# Altium PCB ORCS4.PcbDoc (part 1 of 2)
Units mm, origin at the board's own origin, x right, y up, seen from the top; angles counter-clockwise.
Board outline 75.18 x 74.8 mm, 2 copper layers (Top Layer, Bottom Layer); 94 components, 96 nets, 440 pads, 113 vias.
Unrouted connection lines stored in the file: 4.
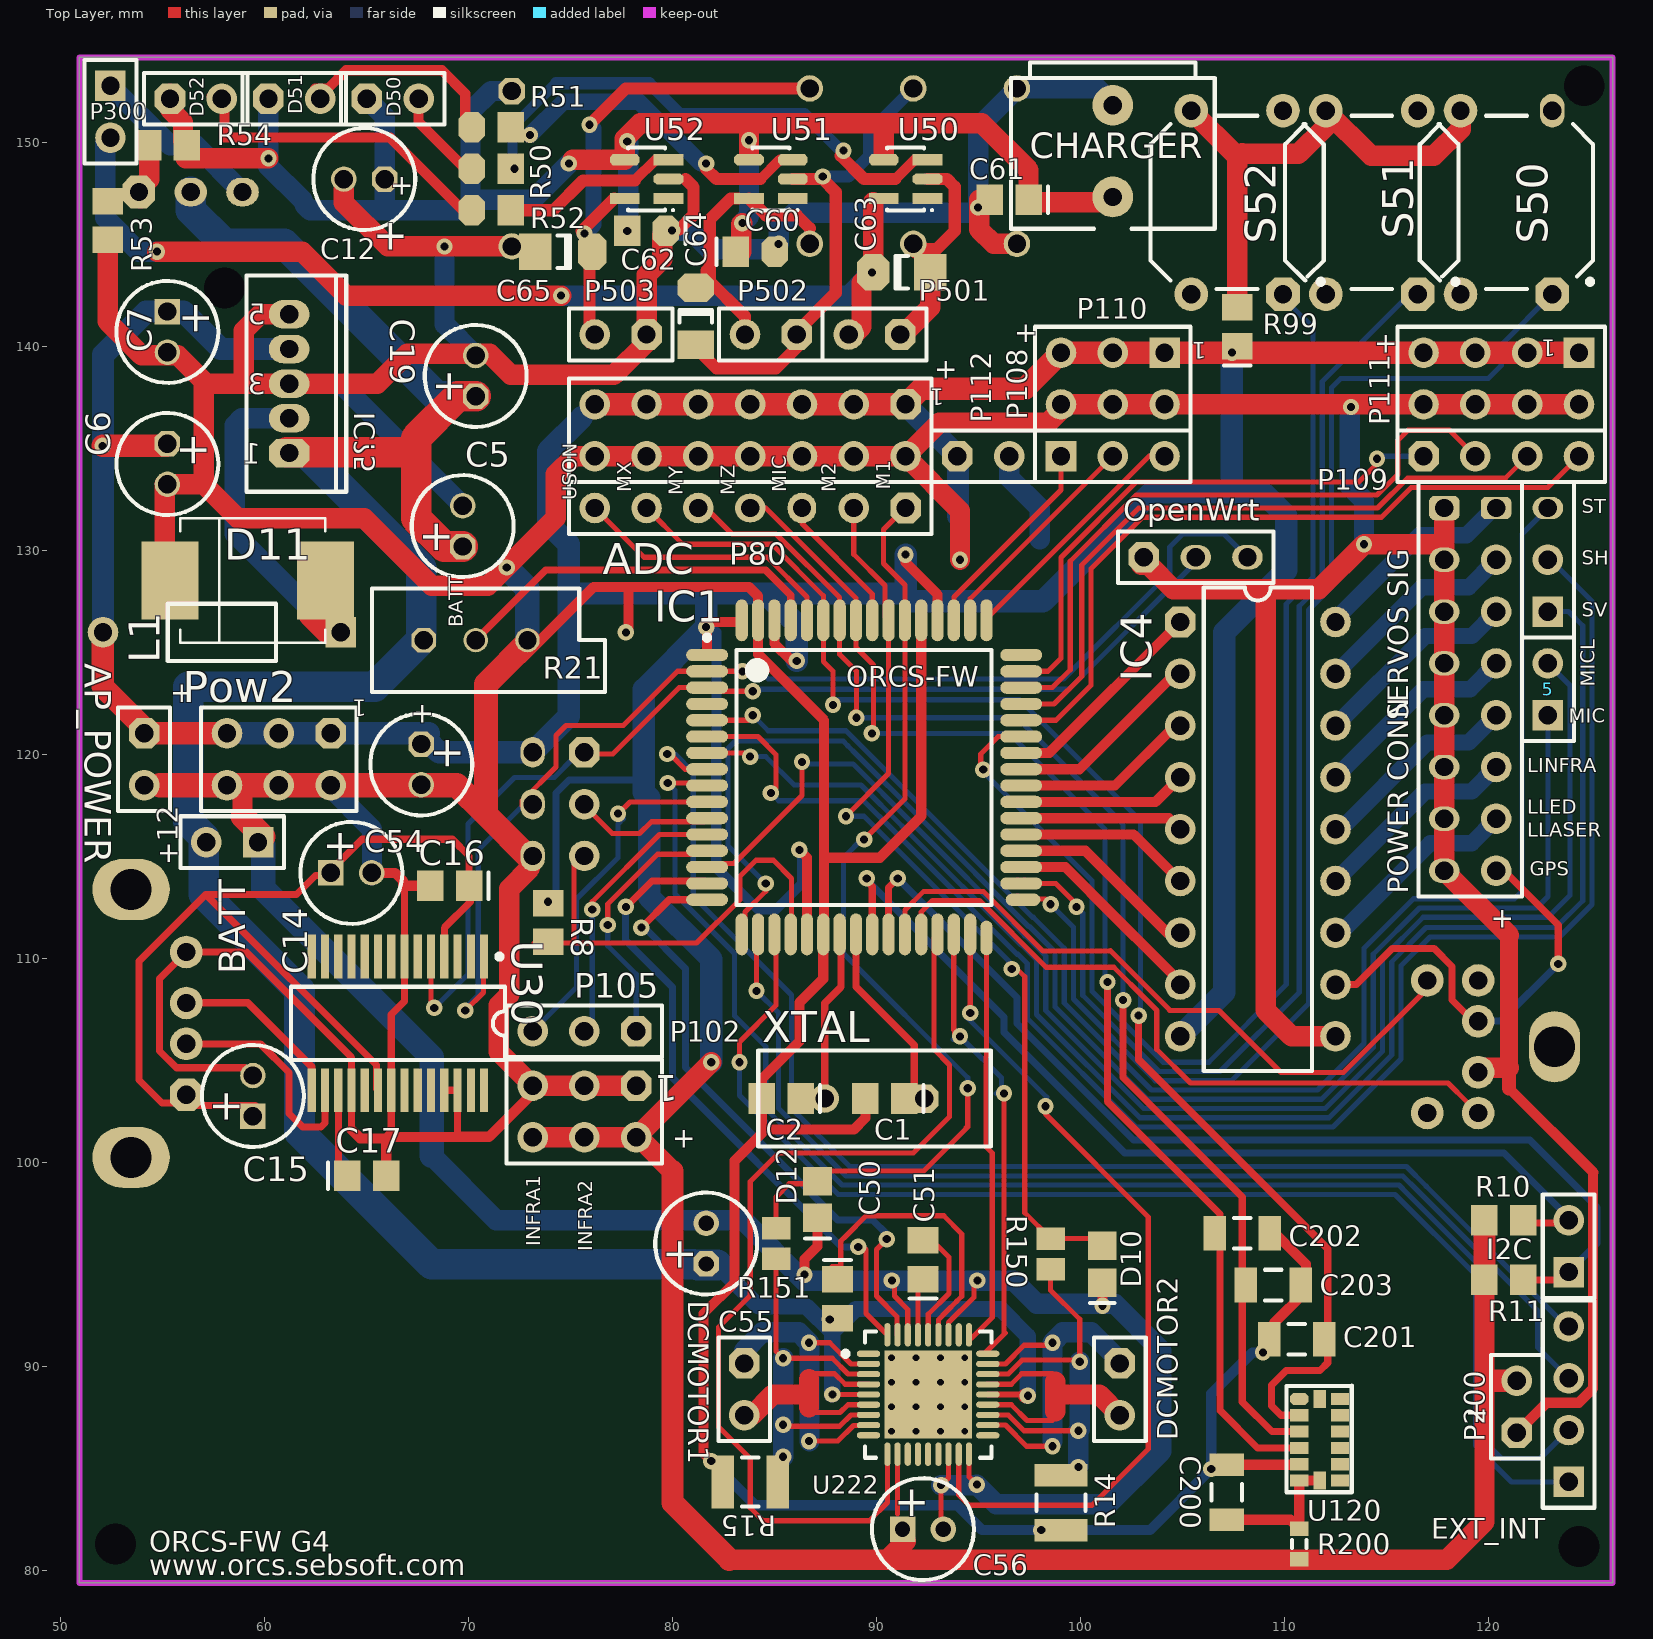
[diagram p0: Top Layer view]
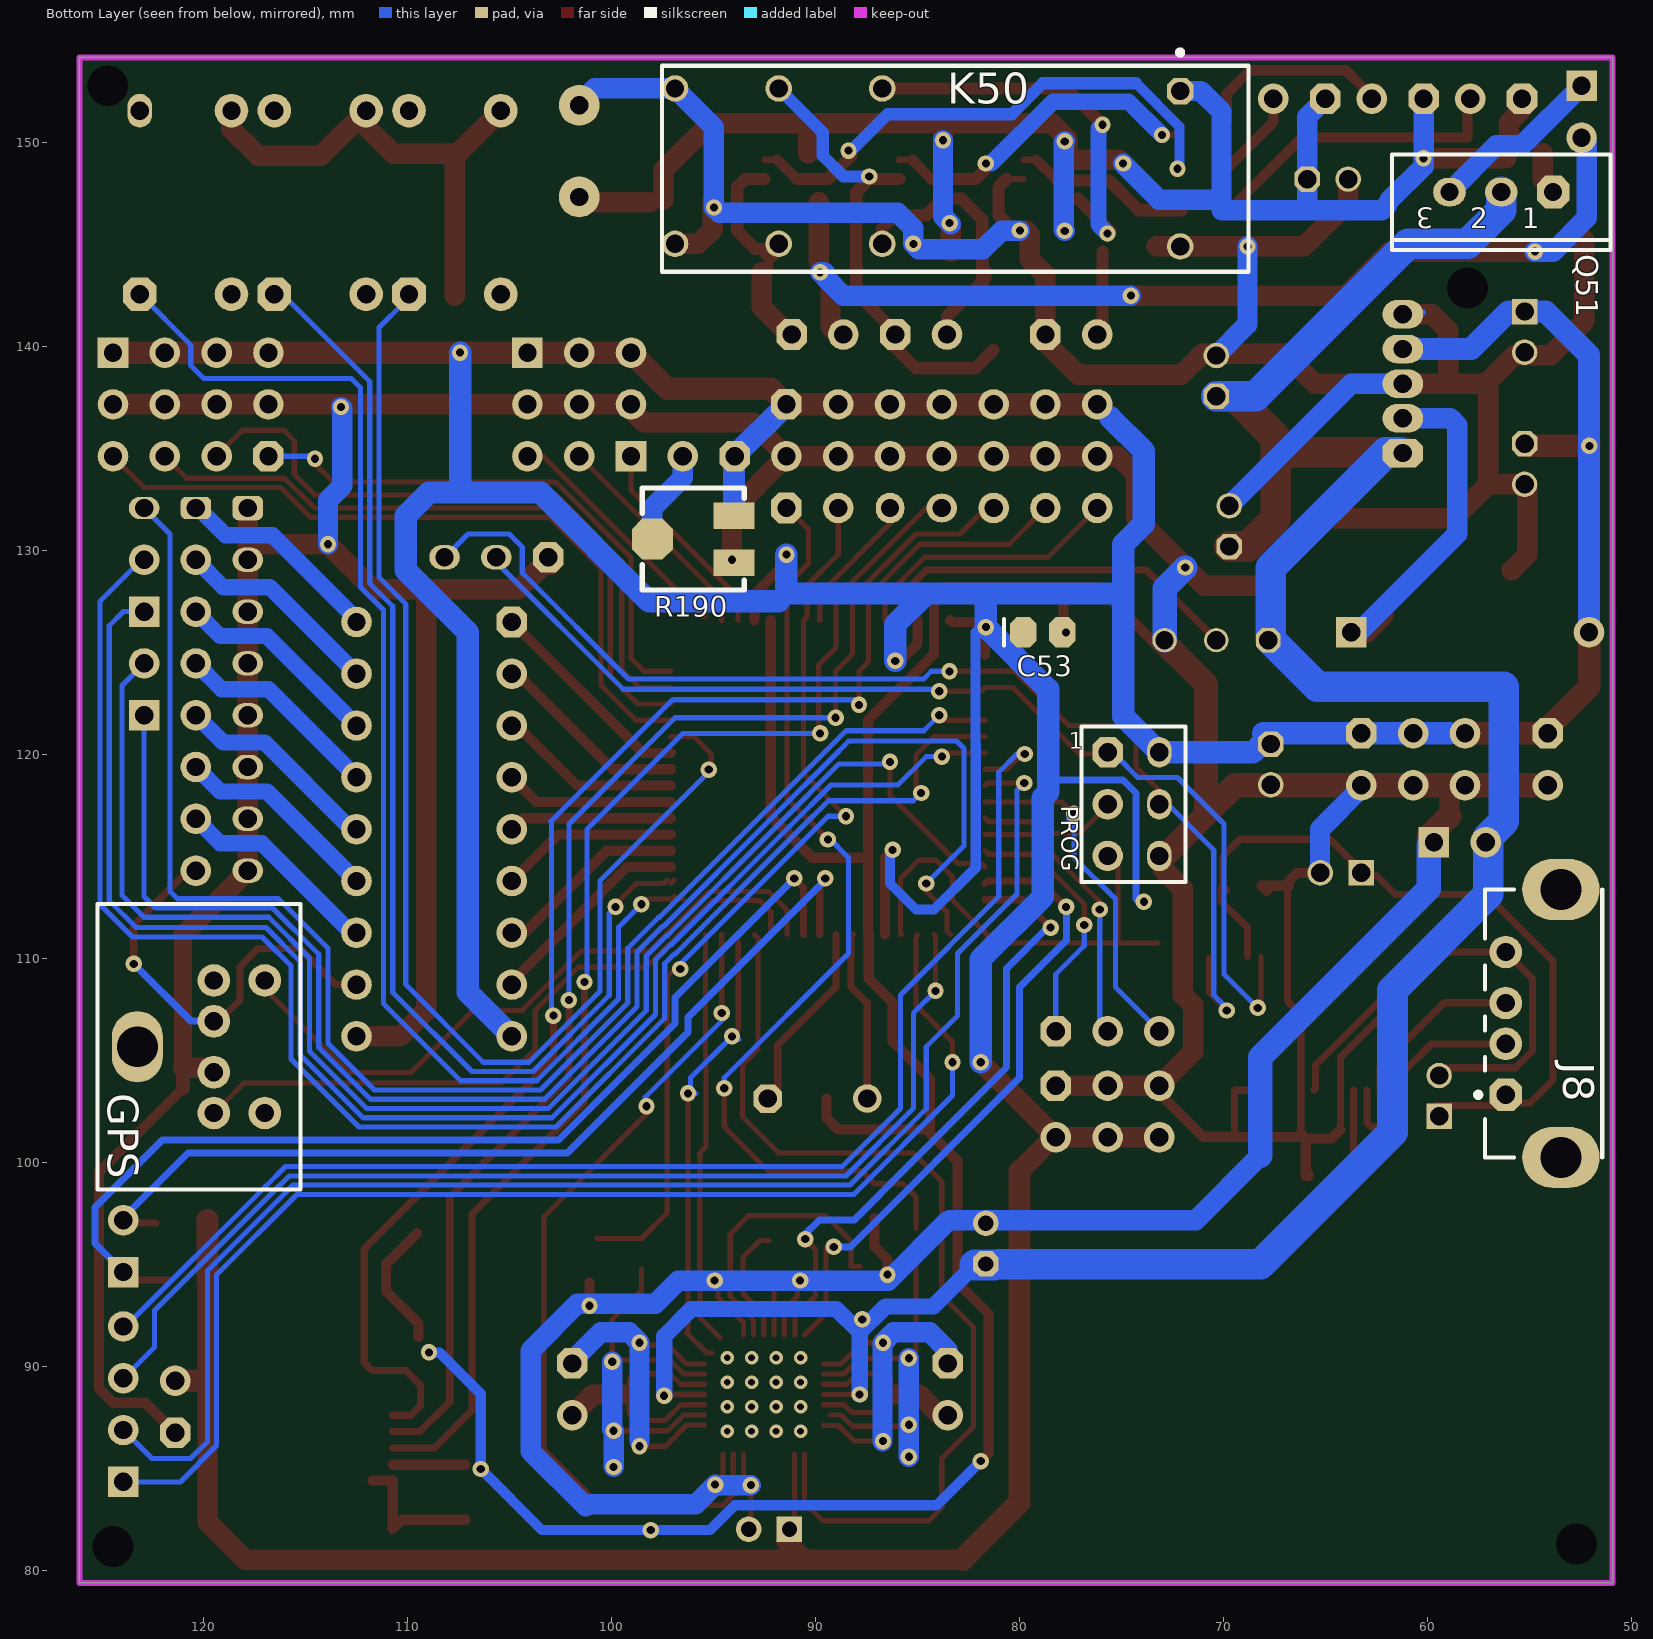
[diagram p1: Bottom Layer view, seen from below]

## Layer stack, top to bottom
Top Layer: signal copper 0.0356
Dielectric: dielectric 0.32, FR-4, Dk 4.8
Bottom Layer: signal copper 0.0356

## Board outline
50.927,79.375 126.111,79.375 126.111,154.178 50.927,154.178

## Design rules (kind name [scope] priority, off if disabled: settings)
Clearance [All] p1: gap=0.2
FabricationTestPointUsage TestPointUsage [All] p1: valid=0 allowmultiple=FALSE
FabricationTestpoint Testpoint [All] p1: side=3 testpointundercomponent=TRUE minsize=1.016 maxsize=2.54 preferedsize=1.524 minholesize=0 maxholesize=1.016 preferedholesize=0.813 testpointgrid=0.025 allowsidetop=TRUE allowsidebottom=TRUE usegrid=TRUE gridtolerance=0
PolygonConnect [All] p1: connectstyle=Relief reliefconductorwidth=0.254 reliefentries=4 polygonreliefangle="90 Angle"
RoomDefinition ORCS4 [InComponentClass('ORCS4')] p1: confinementstyle=ConfineIn formatcopy=TRUE lockcomponents=FALSE outline 126.873,77.724 144.907,77.724 144.907,98.298 126.873,98.298
RoutingVias [All] p1: holewidth=0.4 width=0.8 viastyle="Through Hole" minholewidth=0.4 minwidth=0.8 maxholewidth=0.4 maxwidth=0.8
SilkscreenOverComponentPads [All] p1: minsilkscreentomaskgap=0.254
SolderMaskExpansion [All] p1: expansion=0.102
Width Width_12V [InNet('+12V')] p1: maxlimit=1.5 minlimit=0.7 preferedwidth=1
Width Width_GROUND [InNet('GROUND')] p2: maxlimit=1.2 minlimit=0.254 preferedwidth=0.5
Width Width_5V [InNet('5V')] p3: maxlimit=1.2 minlimit=0.254 preferedwidth=0.35
Width [All] p4: maxlimit=1.1 minlimit=0.254 preferedwidth=0.254
25 further rules are at their usual default settings.

## Components (designator, comment, footprint, x,y, rotation, side; value= is the part's Value field where it differs from the comment)
5 "Header 2" HDR1X2#1 122.936,121.92 r90 top (schematic designator SERVO2)
ADC "Header 7" HDR1X7 91.44,132.08 r180 top
AP_POWER "Header 2" HDR1X2#2 54.102,121.031 r270 top
BATT "Header 2" HDR1X2#1 59.69,115.697 r180 top
C1 "Cap Pol3" C0805#1 90.424,103.124 r180 top
C2 "Cap Pol3" C0805#1 85.344,103.124 r180 top
C5 "Cap Pol1" B#1 69.723,131.191 r90 top
C6 "Cap Pol1" B#1 55.245,134.239 r270 top
C7 "Cap Pol1" B#2 55.245,140.716 r270 top
C12 "Cap Pol1" B#1 64.897,148.209 r180 top
C14 "Cap Pol1" B#2 64.262,114.189 r0 top
C15 "Cap Pol1" B#2 59.436,103.251 r90 top
C16 "Cap Pol3" C0805#1 69.088,113.554 r180 top
C17 "Cap Pol3" C0805#1 65.024,99.33 r0 top
C19 "Cap Pol1" B#1 70.358,138.557 r90 top
C50 "Cap Pol3" C0805#1 88.103,93.31 r270 top
C51 "Cap Pol3" C0805#1 92.294,95.215 r90 top
C53 "Cap Pol3" C0805#2 78.867,125.984 r180 bottom
C54 "Cap Pol1" B#1 67.691,119.507 r270 top
C55 "Cap Pol1" B#3 81.661,96.012 r90 top
C56 "Cap Pol1" B#4 92.294,82.007 r0 top
C60 "Cap Pol3" C0805#3 84.074,144.653 r0 top
C61 "Cap Pol3" C0805#1 96.52,147.193 r180 top
C62 "Cap Pol3" C0805#4 78.74,145.669 r180 top
C63 "Cap Pol3" C1206#1 91.247,143.637 r0 top
C64 "Cap Pol3" C1206#2 81.153,141.478 r270 top
C65 "Cap Pol3" C1206#3 74.676,144.653 r180 top
C200 "Cap Semi" CAPC3216L 107.188,83.82 r270 top
C201 "Cap Semi" CAPC3216L 110.617,91.313 r180 top
C202 "Cap Semi" CAPC3216L 107.95,96.52 r180 top
C203 "Cap Semi" CAPC3216L 109.474,93.98 r180 top
CHARGER "161-0097" 161 101.6,155.829 r90 top (schematic designator CHAR)
D10 "D Zener" CAPC2512L 101.092,94.996 r90 top
D11 "Diode 1N5408" DIODE_SMC 59.182,128.524 r0 top
D12 "D Zener" CAPC2512L 87.122,98.171 r90 top
D50 "Diode" HDR1X2#2 65.024,152.146 r0 top
D51 "Diode" HDR1X2#2 60.198,152.146 r0 top
D52 "Diode" HDR1X2#2 55.372,152.146 r0 top
DCMOTOR1 "Header 2" HDR1X2#2 83.531,90.135 r270 top
DCMOTOR2 "Header 2" HDR1X2#2 101.946,90.135 r270 top
EXT_INT "Header 4" HDR1X4#1 123.952,84.328 r90 top (schematic designator SENSORS)
GPS "PS2-6PIN" PS2-6PIN 128.016,105.664 r90 bottom
I2C "Header 2" HDR1X2#1 123.952,94.615 r90 top
IC1 "ATmega128L-8AI" 64A_M 89.408,118.872 r0 top
IC4 "SW DIP-9" DIP-18 108.712,116.332 r270 top
IC?5 "LM2576T-5" 314D-03 61.214,138.176 r90 top (schematic designator IC�5)
J8 "787616-1" 787616 43.18,106.807 r180 bottom
K50 "Relay-DPDT" DIP-P8 74.676,148.717 r0 bottom
L1 "Inductor" PIN-W2/E2.8 57.912,125.984 r180 top
OpenWrt "Header 3" HDR1X3#1 103.124,129.667 r0 top
P80 "Header 7X2A" HDR2X7_CEN 91.44,137.16 r180 top
P102 "Header 3X2" HDR2X3#1 78.232,103.759 r180 top
P105 "Header 3" HDR1X3#2 78.232,106.426 r180 top
P108 "Header 3" HDR1X3#3 99.06,134.62 r0 top
P109 "Header 4" HDR1X4#2 116.84,134.62 r0 top
P110 "Header 3X2" HDR2X3#2 104.14,139.7 r180 top
P111 "Header 4X2" HDR2X4 124.46,139.7 r180 top
P112 "Header 2" HDR1X2#2 93.98,134.62 r0 top
P200 "Header 2" HDR1X2#2 121.412,86.741 r90 top
P300 "ON/OFF" HDR1X2#1 52.451,152.781 r270 top
P501 "Header 2" HDR1X2#2 91.186,140.589 r180 top
P502 "Header 2" HDR1X2#2 86.106,140.589 r180 top
P503 "Header 2" HDR1X2#2 78.74,140.589 r180 top
Pow2 "Header 3X2" HDR2X3#1 63.246,121.031 r180 top
"POWER CONN" "Header 8X2" HDR2X8 117.856,132.08 r270 top (schematic designator CON1)
PROG "Header 3X2" HDR2X3#3 75.692,120.099 r270 bottom (schematic designator PROGRAMMER)
Q51 "IRF4905" TO-220AB 56.388,147.574 r0 bottom
R8 "Res2" 2012[0805]#1 73.914,111.76 r270 top
R10 "Res2" 2012[0805]#1 120.777,97.155 r0 top
R11 "Res2" 2012[0805]#1 120.777,94.234 r0 top
R14 "Res2" RESC3225L 99.06,83.312 r90 top
R15 "Res2" RESC3225L 83.82,84.328 r0 top
R21 "Res Tap" VR5 70.358,125.603 r0 top
R50 "Res2" 2012[0805]#2 71.12,148.717 r180 top
R51 "Res2" 2012[0805]#2 71.12,150.749 r180 top
R52 "Res2" 2012[0805]#2 71.12,146.685 r180 top
R53 "Res2" 2012[0805]#1 52.324,146.177 r270 top
R54 "Res2" 2012[0805]#1 55.245,149.86 r180 top
R99 "Res2" C0805#1 107.696,140.97 r90 top
R150 "Res2" CAPC2012L 98.552,95.504 r270 top
R151 "Res2" CAPC2012L 85.09,96.012 r270 top
R190 "RPot SM 10K" POT4MM-2 96.012,130.556 r0 bottom
R200 "Res3" RESC1608L 110.744,81.28 r270 top
S50 "IT-2175" IT-2175#1 120.904,147.066 r90 top
S51 "IT-2175" IT-2175#2 114.3,147.066 r90 top
S52 "IT-2175" IT-2175#2 107.696,147.066 r90 top
"SERVOS SIG" "Header 3" HDR1X3#4 122.936,127 r90 top (schematic designator SERVOS)
U30 "FT232RL" SSOP28 66.548,106.807 r180 top
U50 "MAX6305UK00D1-T" SOT23-5#1 91.44,148.209 r90 top
U51 "MAX6305UK00D1-T" SOT23-5#2 84.836,148.209 r90 top
U52 "MAX6305UK00D1-T" SOT23-5#1 78.74,148.209 r90 top
U120 "MEMS" "LGA14 - duplicate" 110.744,88.392 r0 top
U222 "A3995" QFN50P600X600-36V1M 92.548,88.611 r0 top
XTAL "ECS-44-20-1" HC-49U 89.916,103.124 r180 top

## Footprints (in the part's own frame and the unit in brackets; to place one, negate y for a bottom-side part, rotate by r counter-clockwise, add the part's x,y. Pads: shape width x height; smd on the part's side, far side on the other; paste and mask are expansions set on the pad)
64A_M [mm] "Thin QFP, 64-Leads, Body 14x14mm, Pitch 0.8mm, IPC Low Density"
  oval 2.05x0.6 smd: 1(-7.7,6) 2(-7.7,5.2) 3(-7.7,4.4) 4(-7.7,3.6) 5(-7.7,2.8) 6(-7.7,2) 7(-7.7,1.2) 8(-7.7,0.4) 9(-7.7,-0.4) 10(-7.7,-1.2) 11(-7.7,-2) 12(-7.7,-2.8) 13(-7.7,-3.6) 14(-7.7,-4.4) 15(-7.7,-5.2) 16(-7.7,-6) 34(7.7,-5.2) 35(7.7,-4.4) 36(7.7,-3.6) 37(7.7,-2.8) 38(7.7,-2) 39(7.7,-1.2) 40(7.7,-0.4) 41(7.7,0.4) 42(7.7,1.2) 43(7.7,2) 44(7.7,2.8) 45(7.7,3.6) 46(7.7,4.4) 47(7.7,5.2) 48(7.7,6)
  oval 0.6x2.05 smd: 17(-6,-7.7) 18(-5.2,-7.7) 19(-4.4,-7.7) 20(-3.6,-7.7) 21(-2.8,-7.7) 22(-2,-7.7) 23(-1.2,-7.7) 24(-0.4,-7.7) 25(0.4,-7.7) 26(1.2,-7.7) 27(2,-7.7) 28(2.8,-7.7) 29(3.6,-7.7) 30(4.4,-7.7) 31(5.2,-7.7) 49(6,7.7) 50(5.2,7.7) 51(4.4,7.7) 52(3.6,7.7) 53(2.8,7.7) 54(2,7.7) 55(1.2,7.7) 56(0.4,7.7) 57(-0.4,7.7) 58(-1.2,7.7) 59(-2,7.7) 60(-2.8,7.7) 61(-3.6,7.7) 62(-4.4,7.7) 63(-5.2,7.7) 64(-6,7.7)
  oval 0.6x1.7 smd: 32(6,-7.872)
  oval 1.7x0.6 smd: 33(7.792,-6)
  silkscreen extent -7.82,-6.25 6.25,6.97, body extent -7,-7 7,7, height 1.2
161 [mm] "Two Conductor Jack (RCA), Right Angle, Thru-Hole, Body 10 x 10 x 13 mm (WxTxH)"
  round 2 hole 0.9: 1A(-4,0) 2B(-8.496,0)
  silkscreen extent -10.07,-5 -1.9,5
314D-03 [mm] "TO, Thru-Hole, Vertical, Heatsink Mounted; 5 In-Line Leads; Pitch 1.70 mm"
  oct 1.4x2 hole 0.9: 1(-3.4,0)
  oval 1.4x2 hole 0.9: 2(-1.7,0) 3(0,0) 4(1.7,0) 5(3.4,0)
  silkscreen extent -5.3,-2.8 5.3,2.1
2012[0805]#1 [mm] "Chip Resistor; Body 2.0 x 1.3 mm (LxW typ)"
  rect 1.3x1.5 smd: 1(-0.95,0) 2(0.95,0)
2012[0805]#2 [mm]
  rect 1.3x1.5 smd: 1(-0.95,0)
  oct 1.3x1.5 smd: 2(0.95,0)
787616 [mm] "Connector; USB1.1, Type A, Thru-Hole; 4 Position; Right Angle"
  oct 1.6x1.6 hole 0.9: 1(-12.99,-3.5)
  round 1.6 hole 0.9: 2(-12.99,-1) 3(-12.99,1) 4(-12.99,3.5)
  oval 3.8x3 hole 2: 5(-10.28,6.57) 6(-10.28,-6.57)
  silkscreen extent -14.47,-6.57 -8.25,6.57
B#1 [mm] "Capacitor, Electrolytic, Radial; Body 5 x 6.8 mm (Dia.xH typ); Pin Spacing 2 mm (typ)"
  oct 1.25x1.25 hole 0.9: 1(-1,0)
  round 1.25 hole 0.9: 2(1,0)
  silkscreen extent -2.5,-2.5 2.5,2.5
B#2 [mm] "Capacitor, Electrolytic, Radial; Body 5 x 6.8 mm (Dia.xH typ); Pin Spacing 2 mm (typ)"
  rect 1.25x1.25 hole 0.9: 1(-1,0)
  round 1.25 hole 0.9: 2(1,0)
  silkscreen extent -2.5,-2.5 2.5,2.5
B#3 [mm]
  oct 1.25x1.25 hole 0.75: 1(-1,0)
  round 1.25 hole 0.75: 2(1,0)
  silkscreen extent -2.5,-2.5 2.5,2.5
B#4 [mm]
  rect 1.25x1.25 hole 0.75: 1(-1,0)
  round 1.25 hole 0.75: 2(1,0)
  silkscreen extent -2.5,-2.5 2.5,2.5
C0805#1 [mm] "Chip Capacitor; Body 2.0 x 1.2 mm (LxW typ)"
  rect 1.3x1.5 smd: 1(-0.95,0) 2(0.95,0)
  silkscreen extent -1.9,-0.65 -1.9,0.65
C0805#2 [mm] "Chip Capacitor; Body 2.0 x 1.2 mm (LxW typ)"
  oct 1.3x1.5 smd: 1(-0.95,0) 2(0.95,0)
  silkscreen extent -1.9,-0.65 -1.9,0.65
C0805#3 [mm] "Chip Capacitor; Body 2.0 x 1.2 mm (LxW typ)"
  rect 1.3x1.5 smd: 1(-0.95,0)
  oct 1.3x1.5 smd: 2(0.95,0)
  silkscreen extent -1.9,-0.65 -1.9,0.65
C0805#4 [mm]
  oct 1.3x1.5 smd: 1(-0.95,0)
  rect 1.3x1.5 smd: 2(0.95,0)
  silkscreen extent -1.9,-0.65 -1.9,0.65
C1206#1 [mm] "Chip Capacitor; Body 3.2 x 1.6 mm (LxW typ)"
  oct 1.6x1.8 smd: 1(-1.4,0)
  rect 1.6x1.8 smd: 2(1.4,0)
  silkscreen extent -0.3,-0.8 0.3,0.8
C1206#2 [mm] "Chip Capacitor; Body 3.2 x 1.6 mm (LxW typ)"
  oct 1.4x1.8 smd: 1(-1.4,0)
  rect 1.4x1.8 smd: 2(1.4,0)
  silkscreen extent -0.3,-0.8 0.3,0.8
C1206#3 [mm] "Chip Capacitor; Body 3.2 x 1.6 mm (LxW typ)"
  oct 1.4x1.8 smd: 1(-1.4,0)
  rect 1.6x1.8 smd: 2(1.4,0)
  silkscreen extent -0.3,-0.8 0.3,0.8
CAPC2012L [mm] "Chip Capacitor, Body 2.0x1.3mm, IPC High Density"
  rect 1.1x1.4 smd: 1(-0.75,0) 2(0.75,0)
  body extent -1.1,-0.72 1.1,0.72, height 1.4
CAPC2512L [mm] "Chip Capacitor, Body 2.54x1.27mm, IPC High Density"
  rect 1.4x1.4 smd: 1(-0.9,0) 2(0.9,0)
  silkscreen extent -1.9,-0.6 -1.9,0.6, body extent -1.45,-0.82 1.45,0.82, height 1.3
CAPC3216L [mm] "Chip Capacitor, Body 3.2x1.6mm, IPC High Density"
  rect 1.1x1.7 smd: 1(-1.35,0) 2(1.35,0)
  silkscreen extent -0.4,-0.75 0.4,0.75, body extent -1.7,-0.9 1.7,0.9, height 1.3
DIODE_SMC [mil] "Magnetic-Core Inductor with Winding Polarity Marking; 2 Leads"
  rect 110x150 smd: 1(-150,0) 2(150,0)
  silkscreen extent -130,-120 150,120
DIP-18 [mm] "DIP; 18 Leads; Row Spacing 7.62 mm; Pitch 2.54 mm"
  oct 1.5x1.5 hole 0.9: 1(-10.16,-3.81)
  round 1.5 hole 0.9: 2(-7.62,-3.81) 3(-5.08,-3.81) 4(-2.54,-3.81) 5(0,-3.81) 6(2.54,-3.81) 7(5.08,-3.81) 8(7.62,-3.81) 9(10.16,-3.81) 10(10.16,3.81) 11(7.62,3.81) 12(5.08,3.81) 13(2.54,3.81) 14(0,3.81) 15(-2.54,3.81) 16(-5.08,3.81) 17(-7.62,3.81) 18(-10.16,3.81)
  silkscreen extent -11.85,-2.65 11.85,2.65
DIP-P8 [mm] "Dual-Pole Dual-Throw Relay; 8 Leads"
  oct 1.3x1.3 hole 0.9: 1(-2.54,-3.81)
  round 1.3 hole 0.9: 2(-2.54,3.81) 11(17.145,3.683) 12(12.065,3.683) 14(22.225,3.683) 21(17.145,-3.937) 22(12.065,-3.937) 24(22.225,-3.937)
  silkscreen extent -5.9,-5.82 22.86,5.05
HC-49U [mm] "Quartz Crystal, Thru-Hole; 2 Leads; Body 11.35 x 4.65 x 13.46 mm (LxWxH max)"
  oct 1.4x1.4 hole 0.9: 1(-2.44,0)
  round 1.4 hole 0.9: 2(2.44,0)
  silkscreen extent -5.7,-2.35 5.7,2.35
HDR1X2#1 [mm] "Connector; Header; 2 Position"
  rect 1.5x1.5 hole 0.9: 1(0,0)
  round 1.5 hole 0.9: 2(2.54,0)
  silkscreen extent -1.27,-1.27 3.81,1.27
HDR1X2#2 [mm] "Connector; Header; 2 Position"
  oct 1.5x1.5 hole 0.9: 1(0,0)
  round 1.5 hole 0.9: 2(2.54,0)
  silkscreen extent -1.27,-1.27 3.81,1.27
HDR1X3#1 [mm] "Connector; Header; 3 Position"
  oct 1.5x1.5 hole 0.9: 1(0,0)
  oval 1.5x1.2 hole 0.9: 2(2.54,0) 3(5.08,0)
  silkscreen extent -1.27,-1.27 6.35,1.27
HDR1X3#2 [mm] "Connector; Header; 3 Position"
  oct 1.5x1.5 hole 0.9: 1(0,0)
  round 1.5 hole 0.9: 2(2.54,0) 3(5.08,0)
  silkscreen extent -1.27,-1.27 6.35,1.27
HDR1X3#3 [mm] "Connector; Header; 3 Position"
  rect 1.5x1.5 hole 0.9: 1(0,0)
  round 1.5 hole 0.9: 2(2.54,0) 3(5.08,0)
  silkscreen extent -1.27,-1.27 6.35,1.27
HDR1X3#4 [mm] "Connector; Header; 3 Position"
  rect 1.5x1.5 hole 0.9: 1(0,0)
  round 1.5 hole 0.9: 2(2.54,0)
  oval 1.1x1.5 hole 0.9: 3(5.08,0)
  silkscreen extent -1.27,-1.27 6.35,1.27
HDR1X4#1 [mm] "Connector; Header; 4 Position"
  rect 1.5x1.5 hole 0.9: 1(0,0)
  round 1.5 hole 0.9: 2(2.54,0) 3(5.08,0) 4(7.62,0)
  silkscreen extent -1.27,-1.27 8.89,1.27
HDR1X4#2 [mm] "Connector; Header; 4 Position"
  oct 1.5x1.5 hole 0.9: 1(0,0)
  round 1.5 hole 0.9: 2(2.54,0) 3(5.08,0) 4(7.62,0)
  silkscreen extent -1.27,-1.27 8.89,1.27
HDR1X7 [mm] "Connector; Header; 7 Position"
  oct 1.5x1.5 hole 0.9: 1(0,0)
  round 1.5 hole 0.9: 2(2.54,0) 5(10.16,0) 6(12.7,0) 7(15.24,0)
  oval 1.4x1.5 hole 0.9: 3(5.08,0)
  oval 1.5x1.4 hole 0.9: 4(7.62,0)
  silkscreen extent -1.27,-1.27 16.51,1.27
HDR2X3#1 [mm] "Connector; Header; 3x2 Position"
  oct 1.5x1.5 hole 0.9: 1(0,0)
  round 1.5 hole 0.9: 2(0,2.54) 3(2.54,0) 4(2.54,2.54) 5(5.08,0) 6(5.08,2.54)
  silkscreen extent -1.27,-1.27 6.35,3.81
HDR2X3#2 [mm] "Connector; Header; 3x2 Position"
  rect 1.5x1.5 hole 0.9: 1(0,0)
  round 1.5 hole 0.9: 2(0,2.54) 3(2.54,0) 4(2.54,2.54) 5(5.08,0) 6(5.08,2.54)
  silkscreen extent -1.27,-1.27 6.35,3.81
HDR2X3#3 [mm] "Connector; Header; 3x2 Position"
  oct 1.5x1.5 hole 0.9: 1(0,0)
  oval 1.5x1.2 hole 0.9: 2(0,2.54) 4(2.54,2.54) 6(5.08,2.54)
  round 1.5 hole 0.9: 3(2.54,0) 5(5.08,0)
  silkscreen extent -1.27,-1.27 6.35,3.81
HDR2X4 [mm] "Connector; Header; 4x2 Position"
  rect 1.5x1.5 hole 0.9: 1(0,0)
  round 1.5 hole 0.9: 2(0,2.54) 3(2.54,0) 4(2.54,2.54) 5(5.08,0) 6(5.08,2.54) 7(7.62,0) 8(7.62,2.54)
  silkscreen extent -1.27,-1.27 8.89,3.81
HDR2X7_CEN [mm] "Connector; Header; 7x2 Position"
  oct 1.5x1.5 hole 0.9: 1(0,0)
  round 1.5 hole 0.9: 2(2.54,0) 3(5.08,0) 4(7.62,0) 5(10.16,0) 6(12.7,0) 7(15.24,0) 8(0,2.54) 9(2.54,2.54) 10(5.08,2.54) 11(7.62,2.54) 12(10.16,2.54) 13(12.7,2.54) 14(15.24,2.54)
  silkscreen extent -1.27,-1.27 16.51,3.81
HDR2X8 [mm] "Connector; Header; 8x2 Position"
  rrect50% 1.2x1.5 hole 0.9: 1(0,0)
  rrect50% 1.1x1.5 hole 0.9: 2(0,2.54)
  oval 1.2x1.5 hole 0.9: 3(2.54,0) 5(5.08,0) 7(7.62,0) 9(10.16,0) 11(12.7,0) 13(15.24,0) 15(17.78,0)
  round 1.5 hole 0.9: 4(2.54,2.54) 6(5.08,2.54) 8(7.62,2.54) 10(10.16,2.54) 12(12.7,2.54) 14(15.24,2.54) 16(17.78,2.54)
  silkscreen extent -1.27,-1.27 19.05,3.81
IT-2175#1 [mm] "Switch, Push Button, Thru-Hole; 4 Leads; Body 8.5 x 8.5 mm (LxW typ); Row Spacing 9.0 mm; Pitch 4.5 mm"
  oct 1.65x1.65 hole 0.9: 1(-4.5,-2.25)
  oval 1.65x1.2 hole 0.9: 2(4.5,-2.25)
  round 1.65 hole 0.9: 3(-4.5,2.25) 4(4.5,2.25)
  silkscreen extent -4.25,-4.25 4.25,4.25
IT-2175#2 [mm] "Switch, Push Button, Thru-Hole; 4 Leads; Body 8.5 x 8.5 mm (LxW typ); Row Spacing 9.0 mm; Pitch 4.5 mm"
  oct 1.65x1.65 hole 0.9: 1(-4.5,-2.25)
  round 1.65 hole 0.9: 2(4.5,-2.25) 3(-4.5,2.25) 4(4.5,2.25)
  silkscreen extent -4.25,-4.25 4.25,4.25
"LGA14 - duplicate" [mm]
  oct 0.9x0.6 smd: 1(0,0)
  rect 0.9x0.6 smd: 2(0,-0.8) 3(0,-1.6) 4(0,-2.4) 5(0,-3.2) 6(0,-4) 8(2,-4) 9(2,-3.2) 10(2,-2.4) 11(2,-1.6) 12(2,-0.8) 13(2,0)
  rect 0.6x0.9 smd: 7(1,-4) 14(1,0)
  silkscreen extent -0.64,-4.57 2.57,0.67
PIN-W2/E2.8 [mm] "Fuse; 2 Leads"
  rect 1.5x1.5 hole 0.9: 1(-5.825,0)
  round 1.5 hole 0.9: 2(5.825,0)
  silkscreen extent -2.65,-1.4 2.65,1.4
POT4MM-2 [mm] "Square Trimming Potentiometer"
  rect 2x1.3 smd: CCW(-2,-1.15) CW(-2,1.15)
  oct 2x2 smd: W(2,0)
  silkscreen extent -2.5,-2.5 2.5,2.5
PS2-6PIN [mm] "PS2 Socket, 6 Pin, Through Hole"
  round 1.6 hole 0.9: 1(-1.25,-8.5) 2(1.25,-8.5) 3(-3.25,-8.5) 4(3.25,-8.5) 5(-3.25,-11) 6(3.25,-11)
  oval 3.5x2.5 hole 2: S(0,-4.75)
  silkscreen extent -7,-12.75 7,-2.79
QFN50P600X600-36V1M [mm] "QFN, 36-Leads, Body 6x6mm, Pitch 0.5mm, IPC Low Density"
  oval 1.15x0.3 smd: 1(-2.925,2) 2(-2.925,1.5) 3(-2.925,1) 4(-2.925,0.5) 5(-2.925,0) 6(-2.925,-0.5) 7(-2.925,-1) 8(-2.925,-1.5) 9(-2.925,-2) 19(2.925,-2) 20(2.925,-1.5) 21(2.925,-1) 22(2.925,-0.5) 23(2.925,0) 24(2.925,0.5) 25(2.925,1) 26(2.925,1.5) 27(2.925,2)
  oval 0.3x1.15 smd: 10(-2,-2.925) 11(-1.5,-2.925) 12(-1,-2.925) 13(-0.5,-2.925) 14(0,-2.925) 15(0.5,-2.925) 16(1,-2.925) 17(1.5,-2.925) 18(2,-2.925) 28(2,2.925) 29(1.5,2.925) 30(1,2.925) 31(0.5,2.925) 32(0,2.925) 33(-0.5,2.925) 34(-1,2.925) 35(-1.5,2.925) 36(-2,2.925)
  rect 4.3x4.3 smd: 37(0,0)
  silkscreen extent -4.17,-3.1 3.1,3.1, body extent -3.08,-3.08 3.08,3.08, height 1
RESC1608L [mm] "Chip Resistor, Body 1.6x0.8mm, IPC High Density"
  rect 0.7x0.9 smd: 1(-0.75,0) 2(0.75,0)
  silkscreen extent -0.2,-0.35 0.2,0.35, body extent -0.85,-0.48 0.85,0.48, height 0.9
RESC3225L [mm] "Chip Resistor, Body 3.2x2.5mm, IPC High Density"
  rect 1.1x2.6 smd: 1(-1.35,0) 2(1.35,0)
  silkscreen extent -0.4,-1.2 0.4,1.2, body extent -1.68,-1.32 1.68,1.32, height 0.9
SOT23-5#1 [mm] "SOT-23/SC-74A; 5 Leads; Body 3 x 3 mm, inc. leads (LxW max)"
  rect 0.55x1.45 smd: 1(-0.95,-1.075) 3(0.95,-1.075) 5(-0.95,1.075)
  oct 0.55x1.45 smd: 2(0,-1.075) 4(0.95,1.075)
  silkscreen extent -1.57,-1.35 1.55,0.9
SOT23-5#2 [mm] "SOT-23/SC-74A; 5 Leads; Body 3 x 3 mm, inc. leads (LxW max)"
  rect 0.55x1.45 smd: 1(-0.95,-1.075) 5(-0.95,1.075)
  oct 0.55x1.45 smd: 2(0,-1.075) 3(0.95,-1.075) 4(0.95,1.075)
  silkscreen extent -1.57,-1.35 1.55,0.9
SSOP28 [mm] "SSOP, Plastic; 28 Leads; Body Width 5.3 mm; Pitch 0.65 mm"
  rect 0.4x2.15 smd: 1(-4.225,-3.275) 2(-3.575,-3.275) 3(-2.925,-3.275) 4(-2.275,-3.275) 5(-1.625,-3.275) 6(-0.975,-3.275) 7(-0.325,-3.275) 8(0.325,-3.275) 9(0.975,-3.275) 10(1.625,-3.275) 11(2.275,-3.275) 12(2.925,-3.275) 13(3.575,-3.275) 14(4.225,-3.275) 15(4.225,3.275) 16(3.575,3.275) 17(2.925,3.275) 18(2.275,3.275) 19(1.625,3.275) 20(0.975,3.275) 21(0.325,3.275) 22(-0.325,3.275) 23(-0.975,3.275) 24(-1.625,3.275) 25(-2.275,3.275) 26(-2.925,3.275) 27(-3.575,3.275) 28(-4.225,3.275)
  silkscreen extent -5.25,-3.4 5.25,1.8
TO-220AB [mm] "TO, Thru-Hole, Vertical, Heatsink Mounted; 3 In-Line Leads; Pitch 2.54 mm"
  oct 1.6x1.6 hole 0.9: 1(-2.54,0)
  oval 1.6x1.4 hole 0.9: 2(0,0) 3(2.54,0)
  silkscreen extent -5.35,-1.85 5.35,2.85
VR5 [mm] "Potentiometer; 3 Leads"
  oct 1.2x1.2 hole 0.9: 1(-2.54,0)
  round 1.2 hole 0.9: 2(0,0) 3(2.54,0)
  silkscreen extent -5.08,-2.54 6.35,2.54

## Part data
5 AP_POWER BATT DCMOTOR1 DCMOTOR2 I2C P112 P200 P501 P502 P503: "Header, 2-Pin"
ADC: "Header, 7-Pin"
C1 C2 C16 C17 C50 C51 C53 C60 C61 C62 C63 C64 C65: "Polarized Capacitor (Surface Mount)"
C5 C6 C7 C12 C14 C15 C19 C54 C55 C56: "Polarized Capacitor (Radial)"
C200 C201 C202 C203: "Capacitor (Semiconductor SIM Model)"
CHARGER: "RCA Phono Jack, Right Angle, Thru-Hole, Snap-In, Black"
D10 D12: "Zener Diode"
D11: "3 Amp Medium Power Silicon Rectifier Diode"
D50 D51 D52: "Default Diode"
EXT_INT P109: "Header, 4-Pin"
GPS: "6 Pin Through Hole PS2 Socket (Kycon P/N)"
IC1: "8-Bit AVR Microcontroller with 128K Bytes of In-System Programmable Flash Memory"
IC4: "DIP Switch, 9 Position, SPST"
IC?5: "Easy Switcher 3.0A Step-Down Voltage Regulator"
J8: "USB 1.1, Right Angle, Thru-Hole, A Type, Receptacle, 4 Position, Black"
K50: "Dual-Pole Dual-Throw Relay"
OpenWrt P105 P108 "SERVOS SIG": "Header, 3-Pin"
P80: "Header, 7-Pin, Dual row"
P102 P110 Pow2 PROG: "Header, 3-Pin, Dual row"
P111: "Header, 4-Pin, Dual row"
P300: library part "Header 2", "Header, 2-Pin"
"POWER CONN": "Header, 8-Pin, Dual row"
Q51: "HEXFET Power MOSFET"
R8 R10 R11 R14 R15 R50 R51 R52 R53 R54 R99 R150 R151 R200: "Resistor"
R21: "Tapped Resistor"
R190: library part "RPot SM", "Square Trimming Potentiometer"
S50 S51 S52: "Tactile Switch, DPST; Thru-Hole; Vertical; Rating DC 12V, 50mA (max)"
U30: library part DS211E, "4 Driver/5 Receiver RS-232 Serial Port"
U50 U51 U52: "5-Pin, Multiple-Input, Programmable Reset IC"
U120: library part MMA7341
U222: "Full-Bridge PWM Motor Driver"
XTAL: "Crystal Oscillator"

## Free pads (board coordinates)
  round 1.524 hole 2: 0(124.714,152.781) 1(58.039,142.875) 2(124.46,81.153) 3(52.705,81.28)

## Via types
v1: diameter 0.8, hole 0.4, Top Layer to Bottom Layer, 97 vias
v2: diameter 0.66, hole 0.33, Top Layer to Bottom Layer, tented top, 16 vias

## Nets (pads, with @x,y where several pads share a name; then routed paths per layer and width w, separated by ;. In a path a pad name is that pad's centre, name@x,y a point inside that pad or via, vN(x,y) a via of type N, cw(c..) or ccw(c..) an arc to the next point about the centre after c; other vN are vias at no path point)
+5VCH: C12.1 C60.1 C61.1 C62.2 CHARGER.2B D50.1 D51.1 D52.1 K50.1 R54.1 U50.4 U51.4 U52.4 | length 81.1
  Top Layer w1: D52.1@55.372,152.4 55.372,151.638 56.007,151.003 R54.1@56.007,150.053 ; R54.1@56.134,149.225 v1(60.198,149.225) ; v1@75.118,149.159 U52.4@77.665,149.159 77.665,150.182 78.424,150.941 95.185,150.941 97.47,148.656 C61.1@97.47,147.193 ; C60.1@83.378,144.653 83.378,145.994 83.434,146.05 v1(83.439,146.05) ; 83.761,149.479 v1(83.761,150.114) 83.761,150.69 ; 90.297,150.749 90.365,150.681 90.365,149.479 ; 98.171,147.066 101.333,147.066 CHARGER.2B@101.6,147.333
  Bottom Layer w1: D51.1@59.944,152.146 60.198,151.892 60.198,148.844 61.849,147.193 ; 61.968,146.955 62.238,146.685 65.897,146.685 ; D50.1@65.024,152.146 65.897,151.273 C12.1@65.897,148.209 65.897,146.685 ; 70.104,146.685 65.897,146.685 ; K50.1@72.136,152.527 71.12,152.527 70.104,151.511 70.104,147.193 73.152,147.193 v1(74.93,148.971) ; v1(77.79,145.669) 77.851,145.73 77.851,149.996 v1(77.79,150.057) ; v1@83.378,145.994 83.761,146.377 v1(83.761,150.114)
+12V: BATT.2 C5.1 C19.1 C50.2 C55.1 IC?5.1 Q51.2 R21.1 U222.5 U222.23 | length 133.9
  Top Layer w0.254: v1@88.103,88.611 U222.5@89.623,88.611
  Top Layer w0.3: U222.23@95.473,88.611 v1@97.374,88.611
  Top Layer w0.7: v1@97.309,88.549 v1(97.436,88.549) v1@97.439,88.549
  Top Layer w1.5: IC?5.1@61.087,134.807 67.437,134.807 ; C5.1@69.723,130.191 68.818,130.191 67.437,131.572 67.437,135.509 69.485,137.557 C19.1@70.358,137.557
  Bottom Layer w0.8: C55.1@82.204,94.961 84.236,92.929 86.579,92.929 87.849,91.659 ; v1(87.849,88.611) 87.849,91.659 ; v1(97.436,88.549) 97.436,91.47 96.104,92.802 88.992,92.802 87.849,91.659
  Bottom Layer w1.5: Q51.2@56.388,147.574 56.388,146.685 58.039,145.034 60.96,145.034 68.437,137.557 C19.1@70.358,137.557 ; BATT.2@57.023,115.57 57.023,113.138 61.722,108.439 61.722,101.473 68.199,94.996 81.026,94.996 ; BATT.2@57.023,115.951 56.261,116.713 56.261,123.317 65.405,123.317 67.691,125.603 67.691,129.159 62.043,134.807 IC?5.1@61.401,134.807 ; C55.1@81.245,94.961 C55.1@82.204,94.961
  other v1: 87.722,92.294
AD1: ADC.2 D10.2 IC1.55 R150.1 | length 44.5
  Top Layer w0.254: v1(88.519,116.967) 90.608,119.056 IC1.55@90.608,126.572 90.435,126.745 90.435,128.28 88.9,129.815 ADC.2@88.9,132.08 ; v1@96.647,109.728 97.282,109.093 97.282,97.524 R150.1@98.552,96.254 D10.2@100.734,96.254
  Bottom Layer w0.254: v1@88.265,116.967 v1(88.519,116.967) 89.408,116.967 v1@96.647,109.728
  other v1: 96.647,109.474
AD2: ADC.1 D12.2 IC1.54 R151.1 | length 47.7
  Top Layer w0.254: R151.1@85.09,96.762 85.09,98.298 85.736,98.944 87.122,98.944 87.746,99.568 92.329,99.568 94.488,101.727 94.488,101.764 ; v1(89.408,115.824) 91.408,117.824 IC1.54@91.408,126.572 91.408,128.302 90.357,129.353 90.357,131.029 ADC.1@91.408,132.08 ; 94.415,101.691 94.488,101.764 ; v1(94.488,103.632) 94.488,101.764
  Bottom Layer w0.254: v1(89.408,115.824) 89.408,115.951 88.392,114.935 88.392,110.236 94.488,104.14 v1(94.488,103.632)
EXT_IO1: EXT_INT.3 IC1.18 | length 54.5
  Top Layer w0.254: v1(84.129,108.403) 84.129,111.093 IC1.18@84.208,111.172
  Bottom Layer w0.254: v1@83.947,108.585 v1(84.129,108.403) 85.217,107.315 85.217,102.63 88.514,99.333 115.819,99.333 116.513,98.639 120.288,94.864 122.428,92.724 122.428,90.932 EXT_INT.3@123.952,89.408
EXT_IO2: EXT_INT.1 IC1.19 | length 61.5
  Top Layer w0.254: v1(83.293,104.902) 83.293,105.899 85.091,107.697 85.091,111.089 IC1.19@85.008,111.172
  Bottom Layer w0.254: v1(83.293,104.902) 83.293,103.27 88.138,98.425 115.443,98.425 119.38,94.488 119.38,91.186 119.38,86.106 121.158,84.328 EXT_INT.1@123.317,84.328
FREE(TEMP): ADC.3 IC1.56 | length 6.9
  Top Layer w0.254: ADC.3@86.36,132.08 86.36,131.318 89.808,127.87 IC1.56@89.808,126.572
GROUND: "POWER CONN.1" "POWER CONN.3" "POWER CONN.5" "POWER CONN.7" "POWER CONN.9" "POWER CONN.11" "POWER CONN.13" "POWER CONN.15" AP_POWER.2 BATT.1 C1.2 C2.2 C5.2 C6.2 C7.2 C12.2 C14.2 C15.2 C16.2 C17.2 C19.2 C53.2 C54.2 C55.2 C56.2 C60.2 C61.2 C62.1 C65.2 C200.1 C201.2 C202.1 C203.1 CHARGER.1A D10.1 D11.1 D12.1 GPS.1 IC1.22 IC1.53 IC1.63 IC4.10 IC?5.3 IC?5.5 J8.4 K50.2 K50.14 K50.24 OpenWrt.1 P80.8 P80.9 P80.10 P80.11 P80.12 P80.13 P80.14 P102.1 P102.3 P102.5 P110.2 P110.4 P110.6 P111.2 P111.4 P111.6 P111.8 P200.1 P503.1 Pow2.2 Pow2.4 Pow2.6 PROG.6 R14.1 R15.1 R21.3 R53.2 R190.CW U30.7 U30.18 U30.21 U30.25 U30.26 U52.2 U120.5 U222.16 U222.18 U222.30 U222.34 | length 637.4
  Top Layer w0.254: v1(90.77,94.199) 90.643,94.072 90.897,93.818 90.897,93.437 91.548,92.786 U222.34@91.548,91.536 ; C56.2@93.183,82.007 v1(93.183,84.166) 93.199,84.166 93.548,84.515 U222.16@93.548,85.686 ; U222.30@93.548,92.105 U222.30@93.548,91.536 93.548,92.137 94.794,93.383 94.794,94.032 v1(94.961,94.199) ; U222.18@94.548,85.686 94.548,84.579 v1(94.935,84.192)
  Top Layer w0.3: U52.2@79.815,148.209 80.645,148.209 ; v1(79.994,145.685) 80.059,145.75 v1@80.345,145.75 ; C60.2@85.278,144.653 C60.2@85.278,144.773
  Top Layer w0.35: C15.2@59.436,104.251 59.055,104.632 55.683,104.632 54.864,105.451 54.864,109.001 J8.4@56.17,110.307 59.111,110.307 64.273,105.145 U30.18@64.273,103.532 64.273,101.589 ; 66.223,101.418 U30.21@66.223,103.532 66.223,107.244 66.873,107.894 U30.7@66.873,110.082 66.873,113.483 ; U30.25@68.823,103.532 U30.26@69.473,103.532 69.473,101.346 69.362,101.235
  Top Layer w0.5: 64.273,101.589 64.693,101.169 65.974,101.169 ; C14.2@65.262,114.189 66.405,114.189 66.802,113.792 66.802,113.554 ; C17.2@65.847,99.33 C17.2@65.847,99.441 ; C17.2@65.974,99.33 65.974,101.169 ; 66.223,101.418 66.04,101.235 ; 66.873,113.483 66.802,113.554 ; C16.2@67.889,113.305 C16.2@68.138,113.554 66.802,113.554 ; 69.362,101.235 66.04,101.235 ; 69.473,101.247 71.021,101.247 P102.5@73.533,103.759 ; 72.644,124.714 76.142,128.212 77.851,128.212 ; v1(77.724,125.984) 77.851,126.111 77.851,128.212 ; v1(81.915,85.344) 81.534,85.725 81.534,92.583 83.058,94.107 83.058,100.076 84.394,101.412 84.394,102.296 ; v1(86.487,94.488) 86.487,95.25 87.122,95.885 D12.1@87.122,97.271 ; C1.2@89.474,103.124 89.474,102.174 88.9,101.6 84.582,101.6 84.394,101.788 C2.2@84.394,103.124 84.394,104.079 86.233,105.918 86.233,107.823 87.408,108.998 IC1.22@87.408,111.172 87.445,111.209 87.445,114.935 ; IC1.53@92.208,126.572 92.208,116.973 90.17,114.935 87.445,114.935 ; v1(98.091,81.962) R14.1@99.06,81.962 ; v1@101.092,93.091 v1(101.092,92.964) D10.1@101.092,94.096 ; C200.1@107.188,85.17 U120.5@110.722,85.17 ; C201.2@109.474,91.44 109.474,92.075 111.078,93.679 111.078,94.996 C202.1@109.554,96.52 ; 121.031,103.632 125.158,99.504 125.152,99.498 125.152,88.911 124.449,88.208 122.879,88.208 P200.1@121.412,86.741 ; 65.974,101.169 66.04,101.235 ; 77.851,128.212 83.751,128.212 84.208,127.755 IC1.63@84.208,126.572 84.208,124.902 87.445,121.665 87.445,114.935
  Top Layer w0.6: v1@80.345,145.75 81.04,146.445 81.04,147.814 80.645,148.209
  Top Layer w0.7: 121.031,103.632 121.031,104.639
  Top Layer w0.9: 121.031,104.893 121.031,111.125
  Top Layer w1: R53.2@52.324,145.227 52.324,141.224 53.975,139.573 55.753,139.573 57.023,138.303 ; D11.1@55.88,129.032 55.118,129.794 55.118,133.239 C6.2@55.245,133.239 57.023,133.239 ; 58.928,116.967 58.928,118.491 ; 58.983,138.7 58.983,140.771 59.788,141.576 IC?5.5@61.214,141.576 ; IC?5.3@60.634,138.176 IC?5.3@61.214,138.176 ; C12.2@63.897,147.701 63.897,147.05 66.04,144.907 C65.2@73.276,144.907 ; 72.009,113.411 72.009,108.204 71.501,107.696 71.501,105.41 P102.5@73.152,103.759 ; 72.042,113.444 73.025,114.427 PROG.6@73.025,114.892 ; P102.5@73.533,103.759 P102.3@75.692,103.759 P102.1@78.232,103.759 ; C62.1@79.68,145.669 79.502,145.491 79.502,144.272 78.74,143.51 78.74,140.208 77.142,138.61 72.083,138.61 71.051,139.642 66.998,139.642 65.532,138.176 IC?5.3@61.214,138.176 ; v1(94.107,129.54) 94.107,131.953 P80.8@91.44,134.62 ; C61.2@95.062,147.193 95.062,146.812 95.062,145.735 95.763,145.034 K50.14@96.901,145.034 ; OpenWrt.1@103.251,129.54 103.188,129.476 102.997,129.286 103.378,129.286 104.574,128.09 111.707,128.09 v1(113.919,130.302) 117.856,130.302 ; 109.093,127.963 109.093,107.442 110.363,106.172 IC4.10@112.522,106.172 ; 117.856,132.08 117.856,130.302 ; GPS.1@119.516,104.639 121.031,104.639 ; 121.031,111.125 117.856,114.3 117.856,116.84 117.856,119.38 117.856,121.92 117.856,124.46 117.856,127 117.856,129.54 117.856,130.302 ; P111.2@124.46,137.16 P111.4@121.92,137.16 P111.6@119.38,137.16 P111.8@116.84,137.16 112.014,137.16 P110.2@104.14,137.16 P110.4@101.6,137.16 P110.6@99.06,137.16 99.06,136.906 98.425,136.271 93.091,136.271 P80.8@91.44,134.62 ; 57.023,133.239 57.023,138.303 ; 57.023,133.239 58.69,131.572 64.897,131.572 68.199,128.27 70.958,128.27 74.295,131.607 74.295,133.731 75.184,134.62 P80.13@78.74,134.62 P80.12@81.28,134.62 P80.11@83.82,134.62 P80.10@86.36,134.62 P80.9@88.9,134.62 P80.8@91.44,134.62 ; 57.023,138.303 57.15,138.176 IC?5.3@61.214,138.176
  Top Layer w1.2: 54.864,118.491 58.928,118.491 61.468,118.491 64.008,118.491 69.426,118.491 70.866,117.051 ; 58.928,116.967 BATT.1@59.944,115.951 ; R21.3@72.962,125.539 70.866,123.444 70.866,117.051 ; PROG.6@73.025,114.892 70.866,117.051
  Bottom Layer w0.254: v1@94.909,84.166 v1(94.935,84.192)
  Bottom Layer w0.35: IC?5.5@60.256,141.674 IC?5.5@60.989,141.674
  Bottom Layer w0.5: v1(81.915,85.344) 84.074,83.185 93.98,83.185 95.203,81.962 v1(98.091,81.962) 103.425,81.962 v1(106.426,84.963) 106.426,88.646 108.458,90.678 v1(108.966,90.678) v1@109.093,90.805
  Bottom Layer w1: IC?5.3@61.214,138.176 63.738,138.176 C5.2@69.723,132.191 ; Pow2.2@63.182,118.427 65.278,116.332 C14.2@65.278,114.062 ; 68.199,100.33 71.374,97.155 83.439,97.155 ; v1(68.834,144.907) 68.834,141.081 C19.2@70.358,139.557 ; v1(79.994,145.685) 80.883,145.685 81.805,144.763 82.722,144.763 84.946,144.763 v1(85.217,145.034) 85.217,145.796 85.979,146.558 94.742,146.558 v1(94.996,146.812) 94.996,150.749 K50.24@96.838,152.591 ; 83.531,97.12 86.452,94.199 v1(90.77,94.199) v1(94.961,94.199) 96.739,94.199 97.882,93.056 101.692,93.056 103.978,90.77 103.978,85.817 101.282,83.121 101.172,83.232 100.123,83.232 95.895,83.232 v1(94.935,84.192) ; v1(93.183,84.166) v1@94.909,84.166 ; K50.24@96.901,152.654 100.838,152.654 CHARGER.1A@101.632,151.86 ; v1(113.284,137.033) 113.219,136.968 113.219,133.161 113.919,132.461 v1(113.919,130.302)
  Bottom Layer w1.2: BATT.1@59.944,115.57 59.944,113.411 68.199,105.156 68.199,100.33 ; v1(71.882,129.159) 72.898,128.143 R21.3@72.898,125.603
INT1: EXT_INT.4 IC1.8 | length 64.9
  Top Layer w0.254: v1(79.756,120.015) 79.883,120.015 80.626,119.272 IC1.8@81.708,119.272
  Bottom Layer w0.254: v1(79.756,120.015) 80.137,120.015 81.026,119.126 81.026,113.03 85.852,108.204 85.852,102.637 88.702,99.787 116.007,99.787 116.967,98.827 123.778,92.016 123.884,92.016 EXT_INT.4@123.952,91.948
INT2: EXT_INT.2 IC1.9 | length 71.9
  Top Layer w0.254: v1(79.779,118.595) 81.585,118.595 IC1.9@81.708,118.472
  Bottom Layer w0.254: v1(79.779,118.595) 80.137,118.237 80.137,113.157 83.058,110.236 83.058,107.188 84.582,105.664 84.582,102.623 88.326,98.879 115.631,98.879 116.059,98.451 119.834,94.676 119.834,86.294 120.657,85.471 122.555,85.471 EXT_INT.2@123.952,86.868